# Altium PCB InvControlCardLayout.PcbDoc (part 2 of 2)
Units mil, origin at the board's own origin, x right, y up, seen from the top; angles counter-clockwise.
Board outline 9055.12 x 6692.91 mil, 4 copper layers (Top, GND PLANE, POWER PLANE, Bottom), stack 25.5 mil thick; 291 components, 194 nets, 954 pads, 275 vias.
Unrouted connection lines stored in the file: 3.
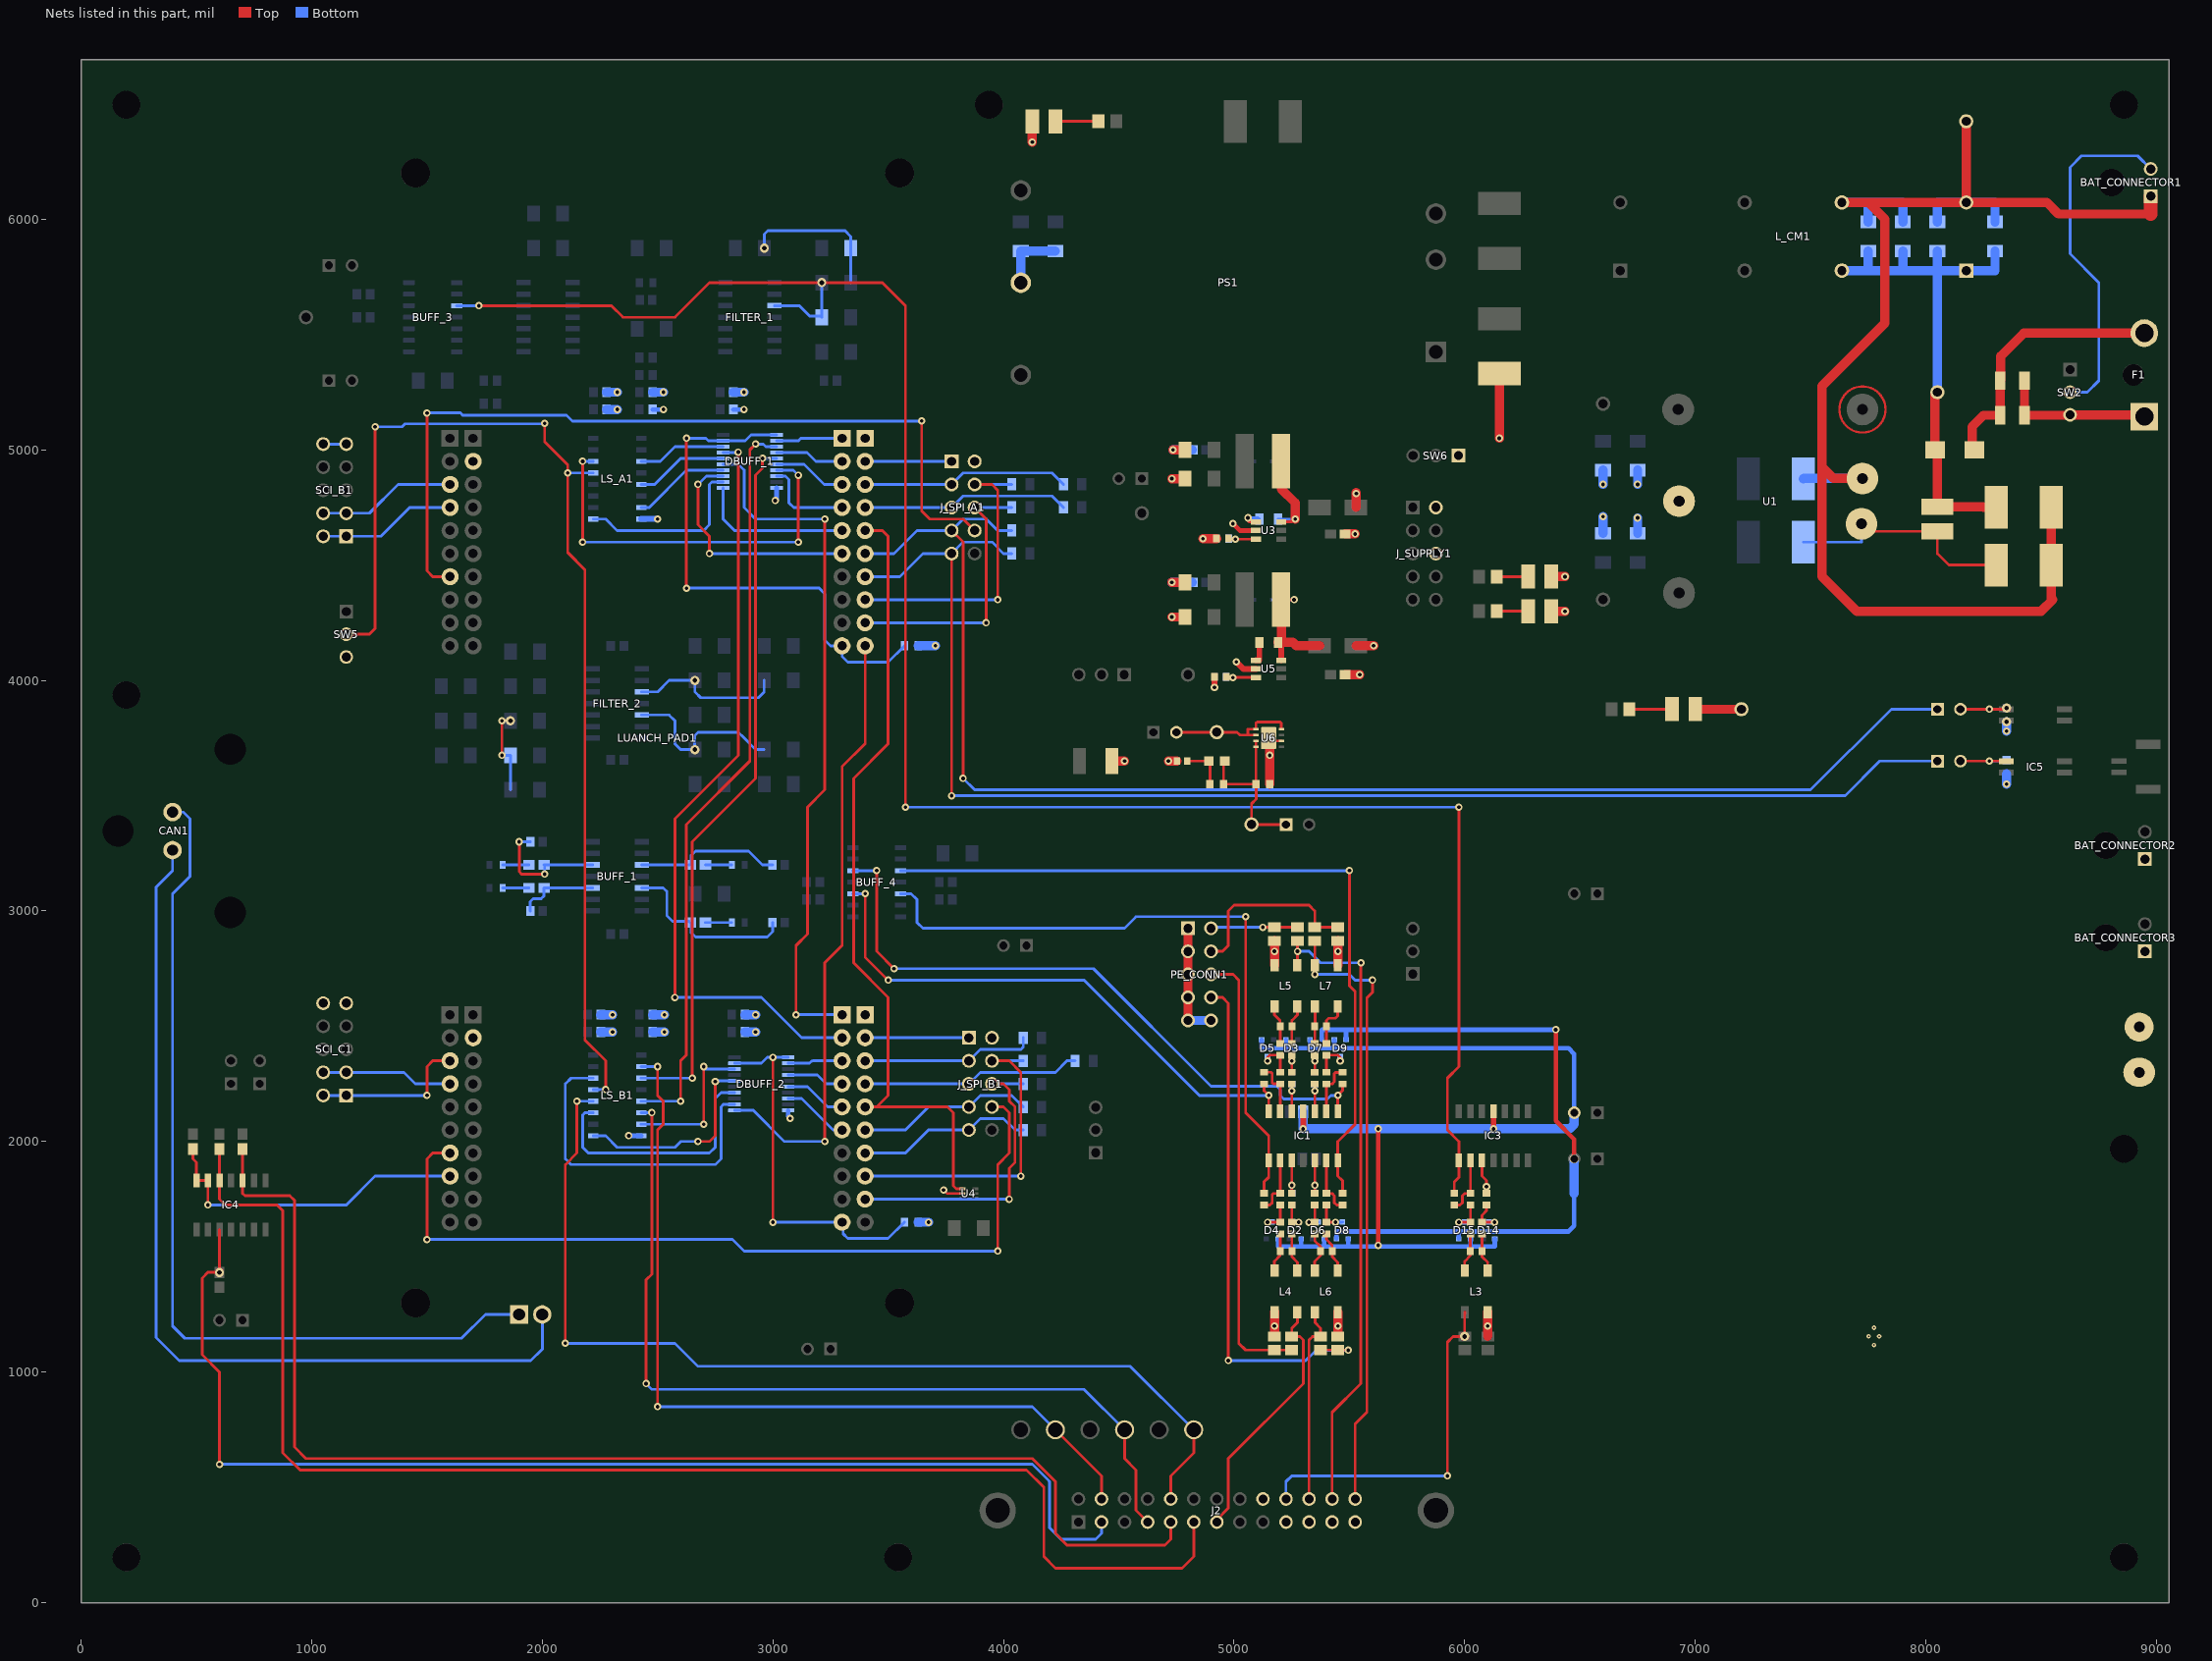
[diagram p4: the nets of this part, all layers, seen from the top]

## Via types
v1: diameter 32, hole 16, Top to Bottom, 259 vias
v2: diameter 40, hole 20, Top to Bottom, 12 vias
v3: diameter 19.68, hole 7.87, Top to Bottom, 4 vias

## Nets (pads, with @x,y where several pads share a name; then routed paths per layer and width w, separated by ;. In a path a pad name is that pad's centre, name@x,y a point inside that pad or via, vN(x,y) a via of type N, cw(c..) or ccw(c..) an arc to the next point about the centre after c; other vN are vias at no path point) (continued)
ERR_HB1_OUT: J2.3 | length 5246.8
  Top w12: v1(600,600) 600,1000 525,1075 525,1400 525,1407.51 550,1432.51 v2(600,1432.51) 600,1618.23
  Bottom w12: v1(600,600) 4125,600 4188.7,536.3 4200,525 4200,325 4250,275 4400,275 4425,300 J2.3@4425,350
ERR_HB2_OUT: IC4.13 IC4.14 LUANCH_PAD1.48 R64.1 | length 1400.5
  Top w12: R64.1@485,1967.49 485,1925 500,1910 IC4.14@500,1831.77 IC4.13@550,1831.77 v1(550,1725)
  Bottom w12: v1(550,1725) 1150,1725 1275,1850 LUANCH_PAD1.48@1600,1850
ERR_HB3_OUT: IC4.10 J2.9 R65.1 | length 5693.1
  Top w12: R65.1@700,1967.49 IC4.10@700,1831.77 700,1775 710,1765 905,1765 925,1745 925,675 975,625 4125,625 4225,525 4225,300 4275,250 4700,250 4725,275 J2.9@4725,350
GND_AUX: C1.2 C3.2 C11.2 C13.2 J2.21 J2.23 J2.25 L3.2 L4.1 L5.2 L6.2 L7.1 | length 636.7
  Top w40: C13.2@5175,2870.47 v1(5175,2825) 5175,2765.35 L5.2@5175.79,2764.57 ; L4.1@5175.79,1260.43 v1@5175.79,1200 ; L6.2@5449.21,1260.43 5450,1259.65 v1(5450,1200) C1.2@5450,1154.53 ; L7.1@5449.21,2764.57 L7.1@5450,2765.35 ; C11.2@5450,2870.47 v1(5450,2825) ; L3.2@6099.21,1260.43 6100,1234.65 v1(6100,1200) 6100,1154.53 ; v1@5175.79,1200 v1(5175,1200) C3.2@5175,1154.53 5175.79,1155.32 v1@5175.79,1200 ; L7.1@5450,2765.35 v1(5450,2825) ; L7.1@5450,2765.35 v1(5450,2825)
GPIO0/PWMOUT1A: DBUFF_1.2 LUANCH_PAD1.40 | length 288.2
  Bottom w12: DBUFF_1.2@3016.14,5039.57 3110.71,5039.57 3121.15,5050 LUANCH_PAD1.40@3300,5050
GPIO1/PWMOUT1B: DBUFF_1.4 LUANCH_PAD1.39 | length 299.8
  Bottom w12: DBUFF_1.4@3016.14,4988.39 3147.65,4988.39 3186.03,4950 LUANCH_PAD1.39@3300,4950
GPIO2/PWMOUT2A: DBUFF_1.6 LUANCH_PAD1.38 | length 320
  Bottom w12: DBUFF_1.6@3016.14,4937.2 3135.64,4937.2 3222.85,4850 LUANCH_PAD1.38@3300,4850
GPIO3/PWMOUT2B: DBUFF_1.8 LUANCH_PAD1.37 | length 399.4
  Bottom w12: DBUFF_1.8@3016.14,4886.02 3055,4886.02 3070,4871.02 3070,4770 3090,4750 LUANCH_PAD1.37@3300,4750
GPIO4/PWMOUT3A: DBUFF_1.11 LUANCH_PAD1.36 | length 671.7
  Bottom w12: DBUFF_1.11@2783.86,4834.84 2783.86,4700 2833.86,4650 LUANCH_PAD1.36@3300,4650
GPIO5/PWMOUT3B: DBUFF_1.13 LUANCH_PAD1.35 | length 1019.5
  Top w12: v1(2675,4850) 2675,4675 2725,4625 v1(2725,4550)
  Bottom w12: v1(2675,4850) 2711.02,4886.02 DBUFF_1.13@2783.86,4886.02 ; v1(2725,4550) LUANCH_PAD1.35@3300,4550
GPIO6/PWMOUT4A: DBUFF_1.15 LUANCH_PAD1.80 | length 3036.2
  Top w12: v1(3100,2550) 3100,2850 3150,2900 3150,3450 3225,3525 v1(3225,4700)
  Bottom w12: DBUFF_1.15@2783.86,4937.2 2850,4937.2 2875,4912.2 2875,4750 2925,4700 v1(3225,4700) ; v1(3100,2550) LUANCH_PAD1.80@3300,2550
GPIO7/PWMOUT4B: DBUFF_1.17 LUANCH_PAD1.79 | length 3343.2
  Top w12: v1(2575,2625) 2575,3399.76 2850,3674.76 v1(2850,4990)
  Bottom w12: v1(2575,2625) 2950,2625 3125,2450 LUANCH_PAD1.79@3300,2450 ; DBUFF_1.17@2783.86,4988.39 2848.39,4988.39 v1(2850,4990)
GPIO8/PWMOUT5A: DBUFF_2.2 LUANCH_PAD1.78 | length 238.2
  Bottom w12: DBUFF_2.2@3066.14,2339.57 3158.82,2339.57 3168.9,2349.65 3174.65,2349.65 3175,2350 LUANCH_PAD1.78@3300,2350
GPIO9/PWMOUT5B: DBUFF_2.4 LUANCH_PAD1.77 | length 249.8
  Bottom w12: DBUFF_2.4@3066.14,2288.39 3192.45,2288.39 3230.83,2250 LUANCH_PAD1.77@3300,2250
GPIO10/PWMOUT6A: DBUFF_2.6 LUANCH_PAD1.76 | length 270
  Bottom w12: DBUFF_2.6@3066.14,2237.2 3150,2237.2 3237.2,2150 LUANCH_PAD1.76@3300,2150
GPIO11/PWMOUT6B: DBUFF_2.8 LUANCH_PAD1.75 | length 290.2
  Bottom w12: DBUFF_2.8@3066.14,2186.02 3125,2186.02 3261.02,2050 LUANCH_PAD1.75@3300,2050
GPIO26/SD2D2: J_SPI_B1.4 LUANCH_PAD1.53 R_UP9.1 | length 1406.3
  Top w12: J_SPI_B1.4@3950,2350 4025,2350 4075,2300 v1(4075,1850)
  Bottom w12: LUANCH_PAD1.53@3400,1850 v1(4075,1850) ; J_SPI_B1.4@3950,2350 R_UP9.1@4085.63,2350
GPIO27/SD2CLK2: J_SPI_B1.6 LUANCH_PAD1.52 R_UP10.1 | length 1341.7
  Top w12: J_SPI_B1.6@3950,2250 4000,2250 4025,2225 4025,2175 4050,2150 4050,1910 4025,1885 v1(4025,1750)
  Bottom w12: LUANCH_PAD1.52@3400,1750 v1(4025,1750) ; J_SPI_B1.6@3950,2250 R_UP10.1@4085.63,2250
GPIO29/OPXBAR6: DBUFF_2.11 LUANCH_PAD1.11 | length 2669.6
  Top w12: v1(3225,2000) 3225,2775 3300,2850 3300,3625 3400,3725 LUANCH_PAD1.11@3400,4150
  Bottom w12: DBUFF_2.11@2833.86,2134.84 2834.02,2135 2915,2135 3050,2000 v1(3225,2000)
GPIO56/SCIC_TX: LUANCH_PAD1.44 SCI_C1.3 SCI_C1.4 | length 570.7
  Bottom w12: SCI_C1.4@1050,2300 SCI_C1.3@1150,2300 1400,2300 1450,2250 LUANCH_PAD1.44@1600,2250
GPIO58/SPIAMOSI: J_SPI_A1.7 LUANCH_PAD1.15 P1.1 R_UP2.1 | length 6204.9
  Top w12: J_SPI_A1.7@3775,4650 3825,4600 v1(3825,3575)
  Bottom w12: LUANCH_PAD1.15@3400,4550 3525,4550 3625,4650 J_SPI_A1.7@3775,4650 3825,4700 3925,4700 3975,4650 R_UP2.1@4035.63,4650 ; v1(3825,3575) 3875,3525 7500,3525 7850,3875 P1.1@8050,3875
GPIO59/SPIAMISO: J_SPI_A1.9 LUANCH_PAD1.14 P15.1 R_UP6.1 | length 6105.6
  Top w12: v1(3775,3500) J_SPI_A1.9@3775,4550
  Bottom w12: LUANCH_PAD1.14@3400,4450 3550,4450 3650,4550 J_SPI_A1.9@3775,4550 3825,4600 3950,4600 4000,4550 R_UP6.1@4035.63,4550 ; v1(3775,3500) 7650,3500 7800,3650 P15.1@8050,3650
GPIO60/SPIACLK: J_SPI_A1.8 LUANCH_PAD1.7 | length 3610.1
  Top w12: v1(1500,5160) 1500,4475 1525,4450 LUANCH_PAD1.7@1600,4450 ; v1(3645,5125) 3645,4735 3680,4700 3785,4700 3825,4700 J_SPI_A1.8@3875,4650
  Bottom w12: v1(1500,5160) 1644.76,5160 1654.76,5150 2105,5150 2130,5125 v1(3645,5125)
GPIO61/SPIACS: J_SPI_A1.1 LUANCH_PAD1.19 | length 375
  Bottom w12: LUANCH_PAD1.19@3400,4950 J_SPI_A1.1@3775,4950
GPIO63/SPIBMOSI: J_SPI_B1.7 LUANCH_PAD1.55 R_UP5.1 | length 768.5
  Bottom w12: LUANCH_PAD1.55@3400,2050 3575,2050 3675,2150 J_SPI_B1.7@3850,2150 3900,2200 4035.63,2200 R_UP5.1@4085.63,2150
GPIO64/SPIBMISO: J_SPI_B1.9 LUANCH_PAD1.54 R_UP1.1 | length 768.5
  Bottom w12: LUANCH_PAD1.54@3400,1950 3575,1950 3675,2050 J_SPI_B1.9@3850,2050 3900,2100 4000,2100 4050,2050 R_UP1.1@4085.63,2050
GPIO65/SPIBCLK: J_SPI_B1.8 LUANCH_PAD1.47 | length 3662.1
  Top w12: v1(1500,1575) 1500,1925 1525,1950 LUANCH_PAD1.47@1600,1950 ; J_SPI_B1.8@3950,2150 4000,2150 4025,2125 4025,1950 3975,1900 v1(3975,1525)
  Bottom w12: v1(1500,1575) 2825,1575 2875,1525 v1(3975,1525)
GPIO66/SPIBCS: J_SPI_B1.1 LUANCH_PAD1.59 | length 450
  Bottom w12: LUANCH_PAD1.59@3400,2450 J_SPI_B1.1@3850,2450
GPIO122/SD1D1: J_SPI_A1.5 LUANCH_PAD1.17 R_UP7.1 | length 902.1
  Bottom w12: LUANCH_PAD1.17@3400,4750 J_SPI_A1.5@3775,4750 3825,4800 4210.63,4800 R_UP7.1@4260.63,4750
GPIO123/SD1CLK1: J_SPI_A1.3 LUANCH_PAD1.18 R_UP3.1 | length 902.1
  Bottom w12: LUANCH_PAD1.18@3400,4850 J_SPI_A1.3@3775,4850 3825,4900 4210.63,4900 R_UP3.1@4260.63,4850
GPIO124/SD1D2: J_SPI_A1.4 LUANCH_PAD1.13 R_UP12.1 | length 1321
  Top w12: J_SPI_A1.4@3875,4850 3950,4850 3975,4825 v1(3975,4350)
  Bottom w12: LUANCH_PAD1.13@3400,4350 v1(3975,4350) ; J_SPI_A1.4@3875,4850 R_UP12.1@4035.63,4850
GPIO125/SD1CLK2: J_SPI_A1.6 LUANCH_PAD1.12 R_UP11.1 | length 1206.3
  Top w12: J_SPI_A1.6@3875,4750 3925,4700 v1(3925,4250)
  Bottom w12: LUANCH_PAD1.12@3400,4250 v1(3925,4250) ; J_SPI_A1.6@3875,4750 R_UP11.1@4035.63,4750
GPIO130/SD2D1: J_SPI_B1.5 LUANCH_PAD1.57 R_UP4.1 | length 952.1
  Bottom w12: LUANCH_PAD1.57@3400,2250 J_SPI_B1.5@3850,2250 3900,2300 4225,2300 4275,2350 R_UP4.1@4310.63,2350
GPIO131/SD2CLK1: J_SPI_B1.3 LUANCH_PAD1.58 R_UP8.1 | length 750.5
  Bottom w12: LUANCH_PAD1.58@3400,2350 J_SPI_B1.3@3850,2350 3900,2400 4075.63,2400 4085.63,2410 R_UP8.1@4085.63,2450
GPIO139/SCIC_RX: LUANCH_PAD1.43 SCI_C1.1 SCI_C1.2 | length 685.4
  Top w12: v1(1500,2200) 1500,2325 1525,2350 LUANCH_PAD1.43@1600,2350
  Bottom w12: SCI_C1.2@1050,2200 SCI_C1.1@1150,2200 v1(1500,2200)
I_ANA_OUT_HB1: C2.1 J2.22 L6.1 | length 861.7
  Top w12: J2.22@5325,450 5325,1139.53 5340,1154.53 C2.1@5375,1154.53 5375,1190.79 5350.79,1215 L6.1@5350.79,1260.43
I_ANA_OUT_HB2: C12.1 J2.24 L5.1 | length 2779.2
  Top w12: L5.1@5274.21,2764.57 5275,2764.57 v1(5275,2825) C12.1@5275,2870.47 ; J2.24@5425,450 5425,825 5550,950 v1(5550,2775)
  Bottom w12: v1(5275,2825) 5325,2825 5375,2775 v1(5550,2775)
I_ANA_OUT_HB3: C10.1 J2.26 L7.2 | length 2698.4
  Top w12: v1(5350,2725) L7.2@5350,2775 ; C10.1@5350,2870.47 L7.2@5350,2775 ; L7.2@5350.79,2764.57 5350,2765.35 L7.2@5350,2775 ; J2.26@5525,450 5525,775 5575,825 5576.25,825 5576.25,2623.75 5600,2647.5 v1(5600,2700)
  Bottom w12: v1(5350,2725) 5500,2725 5525,2700 v1(5600,2700)
I_DIFF_OUT_HB1: BUFF_4.3 IC1.7 R45.2 | length 3395.8
  Top w12: R45.2@5470,1775.59 5470,1830 5450,1850 IC1.7@5450,1918.23 5450,2000 5525,2075 5525,2650 5500,2675 v1(5500,3175)
  Bottom w12: BUFF_4.3@3553.35,3175 v1(5500,3175)
I_DIFF_OUT_HB2: BUFF_4.12 IC1.8 R48.2 | length 2865.2
  Top w12: v1(3450,3175) 3450,2825 v1(3525,2750) ; IC1.8@5450,2131.77 v1(5450,2200) 5450,2201.74 5470,2221.74 R48.2@5470,2249.41
  Bottom w12: BUFF_4.12@3346.65,3175 v1(3450,3175) ; v1(3525,2750) 4390,2750 4900,2240 5185,2240 5200,2225 5200,2200 5215,2185 5405,2185 5420,2200 v1(5450,2200)
I_DIFF_OUT_HB3: BUFF_4.10 IC1.14 R34.2 | length 2452.8
  Top w12: v1(3400,3075) 3400,2800 v1(3500,2700) ; R34.2@5130,2249.41 5130,2220 v1(5150,2200) IC1.14@5150,2131.77
  Bottom w12: BUFF_4.10@3346.65,3075 v1(3400,3075) ; v1(3500,2700) 4350,2700 4850,2200 v1(5150,2200)
MODE: LS_A1.13 LS_B1.13 SW5.2 | length 4916.3
  Top w12: SW5.2@1150,4200 1250,4200 1275,4225 v1(1275,5100) ; v1(2010,5115) 2010,5035 2110,4935 v1(2110,4900) 2110,4555 2185,4480 2185,2440 2275,2350 v1(2275,2225)
  Bottom w12: v1(1275,5100) 1391.18,5100 1403.96,5112.78 2007.78,5112.78 v1(2010,5115) ; v1(2110,4900) LS_A1.13@2221.06,4900 ; LS_B1.13@2221.06,2225 v1(2275,2225)
NET5_1: 5.1 U5.1 | length 92.4
  Top w25: U5.1@5094.88,4087.4 5109.65,4087.4 5.1@5109.65,4165
NET5_2: 5.2 L2.2 U5.6 | length 599.6
  Top w12: L2.2@5203.74,4350 v1(5260,4350)
  Top w25: 5.2@5205,4165 5205.12,4164.88 U5.6@5205.12,4087.4
  Top w40: 5.2@5190.35,4165 5.2@5205,4165 ; L2.2@5203.74,4350 5205,4343.74 5.2@5205,4165 ; 5371.26,4150 5270,4150 5255,4165 5.2@5205,4165
  Bottom w12: 5166.54,4350 v1(5260,4350)
NET6_2: 6.2 8.2 U5.3 | length 161.7
  Top w12: 6.2@4965.59,4015 4967.99,4012.6 v1(4995,4012.6) U5.3@5094.88,4012.6
  Bottom w12: 8.2@4964.61,4015 4967.01,4012.6 v1(4995,4012.6)
NET10_1: 10.1 U3.1 | length 101.3
  Top w12: v1(5060,4705) 5060,4692.4 5065,4687.4 U3.1@5094.88,4687.4
  Bottom w12: v1(5060,4705) 5104.65,4705 10.1@5109.65,4700
NET10_2: 10.2 L8.2 U3.6 | length 418.5
  Top w12: U3.6@5205.12,4687.4 5250,4687.4 5265,4702.4 v1(5265,4700)
  Top w40: L8.2@5203.74,4950 5205,4948.74 5205,4830 5265,4770 5265,4730 v1(5265,4700)
  Bottom w12: 10.2@5190.35,4700 v1(5265,4700)
NET11_2: 11.2 13.2 U3.3 | length 148.9
  Top w12: 11.2@4975.59,4615 4988.19,4612.6 v1(5005,4612.6) U3.3@5094.88,4612.6
  Bottom w12: 13.2@4976.57,4615 4978.98,4612.6 v1(5005,4612.6)
NETBAT_CONNECTOR1_2: BAT_CONNECTOR1.2 SW2.2 | length 1516.8
  Bottom w12: SW2.2@8625,5250 8700,5250 8750,5300 8750,5725 8625,5850 8625,6225 8675,6275 8918.11,6275 BAT_CONNECTOR1.2@8975,6218.11
NETBUFF_1_3: BUFF_1.3 R1.2 R4.2 | length 638.8
  Bottom w12: BUFF_1.3@2431.3,3200 R4.2@2642.49,3200 2645,3202.51 2645,3240 2665,3260 2895,3260 2955,3200 R1.2@2998.43,3200
NETBUFF_1_5: BUFF_1.5 R6.2 R9.2 | length 790.7
  Bottom w12: BUFF_1.5@2431.3,3100 2525,3100 2540,3085 2540,2980 2565,2955 2637.49,2955 R9.2@2642.49,2950 2645,2947.49 2645,2906.57 2665,2886.57 2975,2886.57 2998.43,2910 R6.2@2998.43,2950
NETBUFF_1_10: BUFF_1.10 R11.2 R14.2 | length 356.9
  Bottom w12: R11.2@1948.43,3000 1947.51,3000.92 1947.51,3040 1960,3052.49 1995,3052.49 2007.51,3065 R14.2@2007.51,3100 BUFF_1.10@2218.7,3100
NETBUFF_1_12: BUFF_1.12 R16.2 R19.2 | length 544.8
  Top w12: v1(1900,3300) 1900,3170 1910,3160 v1(2010,3160)
  Bottom w12: v1(1900,3300) R16.2@1948.43,3300 ; v1(2010,3160) 2010,3197.51 R19.2@2007.51,3200 BUFF_1.12@2218.7,3200
NETBUFF_2_3: 
NETC9_1: C9.1 C59.1 L1.2 U1.1 | length 1046.6
  Top w12: U1.1@7721.06,4678.94 7753.15,4646.85 L1.2@8050,4646.85 8050,4550 8100,4500 C9.1@8305.91,4500
  Bottom w12: C59.1@7469.09,4600 7721.06,4600 U1.1@7721.06,4678.94
NETC40_1: 
NETC41_1: 
NETC42_1: C42.1 | length 374
  Top w12: v1(1825,3675) v1(1825,3825)
  Bottom w12: v1(1825,3675) C42.1@1862.01,3675 1862.01,3525 ; v1(1825,3825) v2(1862.01,3825)
NETC43_1: 
NETC44_1: C44.1 | length 651.5
  Bottom w12: v2(2962.99,5875) 2962.99,5935 2977.99,5950 3312.9,5950 3337.99,5924.9 C44.1@3337.99,5875 3337.99,5725
NETC45_1: 
NETC46_1: 
NETC49_1: C49.1 FILTER_1.3 | length 376.4
  Bottom w12: FILTER_1.3@3006.3,5625 3115,5625 3160,5580 3207.01,5580 C49.1@3212.01,5575 v2(3212.01,5725)
NETC50_1: FILTER_2.5 | length 751.5
  Bottom w12: FILTER_2.5@2431.3,3850 2550,3850 2575,3825 2575,3725 2600,3700 v2(2662.01,3700) 2660,3702.01 2660,3760 2675,3775 2850,3775 2875,3750 2925,3700 2962.01,3700
NETC51_1: FILTER_2.3 | length 672.1
  Bottom w12: FILTER_2.3@2431.3,3950 2500,3950 2550,4000 v2(2662.01,4000) 2662.01,3950 2687.01,3925 2700,3925 2937.01,3925 2962.01,3950 2962.01,4000
NETC71_1: C71.1 C72.1 P17.1 R68.2 TP_5.1 U6.3 U6.4 | length 763.9
  Top w12: R68.2@4959.52,3650 4954.53,3645.01 C72.1@4954.53,3550 C71.1@5095.47,3550 ; U6.3@5094.88,3737.2 U6.4@5094.88,3711.61 5094.88,3550.59 C71.1@5095.47,3550 ; P17.1@5225,3375 TP_5.1@5075,3375 5075.47,3375.47 5075.47,3465 5095.47,3485 C71.1@5095.47,3550
NETC72_2: C72.2 R68.1 R69.2 | length 194.9
  Top w12: R69.2@4797.64,3650 R68.1@4890.48,3650 4895.47,3645.01 C72.2@4895.47,3550
NETC_1_1: 
NETCAN1_1: CAN1.1 J3.2 | length 4030.7
  Bottom w12: CAN1.1@396.81,3263.78 396.81,3175 325,3103.19 325,1150 425,1050 1950,1050 2000,1100 J3.2@2000,1250
NETCAN1_2: CAN1.2 J3.1 | length 3886
  Bottom w12: CAN1.2@396.81,3429.13 442.7,3429.13 471.83,3400 471.83,3150 396.83,3074.99 396.83,2775 396.89,1200 450,1146.89 1650,1146.89 1753.11,1250 J3.1@1900,1250
NETD2_3: D2.3 R21.2 R22.1 | length 119.7
  Top w12: R22.1@5250,1724.41 R21.2@5250,1650.59 5250.59,1650 v1(5280,1650)
  Bottom w12: D2.3@5265,1651.42 5278.58,1651.42 v1(5280,1650)
NETD3_3: D3.3 R23.2 R24.1 | length 92.4
  Top w12: R24.1@5250,2300.59 v1(5250,2350) R23.2@5250,2374.41
  Bottom w12: v1(5250,2350) D3.3@5250,2368.58
NETD4_3: D4.3 R29.2 R30.1 | length 149.7
  Top w12: v1(5145,1650) 5199.41,1650 R29.2@5200,1650.59 R30.1@5200,1724.41
  Bottom w12: v1(5145,1650) 5163.58,1650 D4.3@5165,1651.42
NETD5_3: D5.3 R32.2 R33.1 | length 166.8
  Top w12: v1(5145,2350) 5145,2365 5155,2375 5199.41,2375 R32.2@5200,2374.41 R33.1@5200,2300.59
  Bottom w12: v1(5145,2350) D5.3@5145,2368.58
NETD6_3: D6.3 R35.2 R36.1 | length 139.7
  Top w12: v1(5325,1650) 5349.41,1650 R35.2@5350,1650.59 R36.1@5350,1724.41
  Bottom w12: v1(5325,1650) 5363.58,1650 D6.3@5365,1651.42
NETD7_3: D7.3 R37.2 R38.1 | length 94.5
  Top w12: R38.1@5350,2300.59 v1(5350,2350) R37.2@5350,2374.41
  Bottom w12: v1(5350,2350) 5355,2355 D7.3@5355,2368.58
NETD8_3: D8.3 R43.2 R44.1 | length 144.7
  Top w12: R44.1@5400,1724.41 R43.2@5400,1650.59 5439.41,1650.59 v1(5440,1650)
  Bottom w12: v1(5440,1650) 5468.58,1650 D8.3@5470,1651.42
NETD9_3: D9.3 R46.2 R47.1 | length 171.8
  Top w12: R47.1@5400,2300.59 R46.2@5400,2374.41 5400.59,2375 5450,2375 5460,2365 v1(5460,2350)
  Bottom w12: v1(5460,2350) D9.3@5460,2368.58
NETD14_3: D14.3 R58.2 R59.1 | length 162.9
  Top w12: R59.1@6095,1724.41 6095,1700 6075,1680 R58.2@6075,1650.59 6075.59,1650 v1(6130,1650)
  Bottom w12: D14.3@6105,1651.42 6128.58,1651.42 v1(6130,1650)
NETD15_3: D15.3 R61.2 R62.1 | length 149.7
  Top w12: v1(5975,1650) 5975.59,1650.59 R61.2@6025,1650.59 R62.1@6025,1724.41
  Bottom w12: v1(5975,1650) 5998.58,1650 D15.3@6000,1651.42
NETIC1_2: IC1.2 R30.2 R31.1 | length 254.7
  Top w12: R31.1@5130,1724.41 5155,1724.41 5165,1734.41 5165,1770 5170,1775 5199.41,1775 R30.2@5200,1775.59 IC1.2@5200,1918.23
NETIC1_3: IC1.3 R22.2 R25.2 | length 177
  Top w12: R22.2@5250,1775.59 v1(5250,1810) IC1.3@5250,1918.23
  Bottom w12: R25.2@5250,1775.59 v1(5250,1810)
NETIC1_5: IC1.5 R36.2 R39.2 | length 177
  Top w12: R36.2@5350,1775.59 v1(5350,1810) IC1.5@5350,1918.23
  Bottom w12: R39.2@5350,1775.59 v1(5350,1810)
NETIC1_6: IC1.6 R44.2 R45.1 | length 251.8
  Top w12: IC1.6@5400,1918.23 R44.2@5400,1775.59 5400.59,1775 5425,1775 5435,1765 5435,1734.41 5445,1724.41 R45.1@5470,1724.41
NETIC1_9: IC1.9 R47.2 R48.1 | length 229.7
  Top w12: IC1.9@5400,2131.77 R47.2@5400,2249.41 5425,2249.41 5435,2259.41 5435,2295 5440,2300 5469.41,2300 R48.1@5470,2300.59
NETIC1_10: IC1.10 R38.2 R42.2 | length 177.1
  Top w12: IC1.10@5350,2131.77 R38.2@5350,2249.41 5349.41,2220 v1(5350,2220)
  Bottom w12: v1(5350,2220) R42.2@5350,2249.41
NETIC1_12: IC1.12 R24.2 R28.2 | length 177.1
  Top w12: IC1.12@5250,2131.77 R24.2@5250,2249.41 5250.59,2220 v1(5250,2220)
  Bottom w12: v1(5250,2220) R28.2@5250,2249.41
NETIC1_13: IC1.13 R33.2 R34.1 | length 232.6
  Top w12: R34.1@5130,2300.59 5160,2300.59 5165,2295.59 5165,2255 5170,2250 5199.41,2250 R33.2@5200,2249.41 IC1.13@5200,2131.77
NETIC2_3: P1.2 | length 275.9
  Top w12: P1.2@8150,3875 v1(8275,3875) v2@8349.02,3875
  Bottom w12: v1(8275,3875) 8345.47,3875 v2(8350,3879.53)
NETIC3_2: IC3.2 R62.2 R63.1 | length 251.8
  Top w12: R63.1@5955,1724.41 5980,1724.41 5990,1734.41 5990,1765 6000,1775 6024.41,1775 R62.2@6025,1775.59 IC3.2@6025,1918.23
NETIC3_3: IC3.3 R55.1 R59.2 | length 180.4
  Top w12: IC3.3@6075,1918.23 6075,1850 6094.39,1830.61 v1(6094.39,1805) 6094.39,1779.92 R59.2@6095,1775.59
  Bottom w12: v1(6094.39,1805) 6094.39,1776.2 R55.1@6095,1775.59
NETIC5_3: IC5.3 P15.2 R67.2 | length 275.9
  Top w12: P15.2@8150,3650 v1(8275,3650) IC5.3@8349.02,3650
  Bottom w12: v1(8275,3650) 8345.47,3650 R67.2@8350,3654.53
NETL3_2: L3.3 R58.1 R60.2 | length 170.5
  Top w12: R58.1@6075,1599.41 6075.59,1598.82 R60.2@6075.59,1525 6075.59,1500 6100,1475.59 6100,1440.35 L3.3@6099.21,1439.57
NETL3_3: L3.4 R60.1 R61.1 | length 170.5
  Top w12: L3.4@6000.79,1439.57 6000,1440.35 6000,1480.59 6024.41,1505 R60.1@6024.41,1525 6024.41,1598.82 R61.1@6025,1599.41
NETL5_3: L5.3 R27.1 R32.1 | length 170.5
  Top w12: L5.3@5175.79,2585.43 5175,2584.65 5175,2549.41 5199.41,2525 R27.1@5199.41,2500 5200,2499.41 R32.1@5200,2425.59
NETL5_4: L5.4 R23.1 R27.2 | length 170.5
  Top w12: R23.1@5250,2425.59 5250,2499.41 R27.2@5250.59,2500 5250.59,2525 5275,2549.41 5275,2584.65 L5.4@5274.21,2585.43
NETL6_3: L6.3 R40.1 R43.1 | length 180.9
  Top w12: R43.1@5400,1599.41 5400,1575 5425,1550 5425,1525.59 R40.1@5425.59,1525 5425.59,1500 5450,1475.59 5450,1440.35 L6.3@5449.21,1439.57
NETL6_4: L6.4 R35.1 R40.2 | length 180.9
  Top w12: R35.1@5350,1599.41 5350,1569.41 5374.41,1545 R40.2@5374.41,1525 5374.41,1505 5349.41,1480 5349.41,1440.94 L6.4@5350.79,1439.57
NETL7_3: L7.4 R41.1 R46.1 | length 198.1
  Top w12: R46.1@5400,2425.59 5400,2499.41 R41.1@5400.59,2500 5400.59,2525 5410.59,2535 5440,2535 5450,2545 5450,2584.65 L7.4@5449.21,2585.43
NETL7_4: L7.3 R37.1 R41.2 | length 160.7
  Top w12: R37.1@5350,2425.59 5350,2499.41 R41.2@5349.41,2500 5350.79,2501.38 L7.3@5350.79,2585.43
NETLED1_1: LED1.1 RDS1.1 | length 136.4
  Top w12: RDS1.1@6138.43,4300 LED1.1@6274.8,4300
NETLED2_1: LED2.1 RDS2.1 | length 136.4
  Top w12: RDS2.1@6138.43,4450 LED2.1@6274.8,4450
NETLED3_1: LED3.1 RDS3.1 | length 186.4
  Top w12: RDS3.1@6713.43,3875 LED3.1@6899.8,3875
NETLED4_1: LED4.1 RDS4.1 | length 186.4
  Top w12: LED4.1@4225.2,6425 RDS4.1@4411.57,6425
NETP16_2: P16.2 TP_4.1 U6.1 U6.2 U6.8 | length 578.1
  Top w12: P16.2@4750,3775 TP_4.1@4925,3775 5012.8,3775 5025,3762.8 5060,3762.8 ; U6.2@5094.88,3762.8 5060,3762.8 ; U6.8@5205.12,3788.39 5205.12,3815 5200,3820.12 5100,3820.12 5095,3815.12 5095,3788.5 U6.1@5094.88,3788.39 5060,3788.39 5060,3762.8
NETPE_CONN1_1: PE_CONN1.1 PE_CONN1.3 PE_CONN1.5 PE_CONN1.7 PE_CONN1.9 PE_CONN1.10 | length 500
  Top w40: PE_CONN1.9@4800,2525 PE_CONN1.7@4800,2625 PE_CONN1.5@4800,2725 PE_CONN1.3@4800,2825 PE_CONN1.1@4800,2925
  Bottom w40: PE_CONN1.9@4800,2525 PE_CONN1.10@4900,2525
NETR4_1: R4.1 R5.2 | length 114
  Bottom w12: R4.1@2707.51,3200 R5.2@2821.46,3200
NETR9_1: R9.1 R10.2 | length 114
  Bottom w12: R9.1@2707.51,2950 R10.2@2821.46,2950
NETR14_1: R14.1 R15.2 | length 114
  Bottom w12: R15.2@1828.54,3100 R14.1@1942.49,3100
NETR19_1: R19.1 R20.2 | length 114
  Bottom w12: R20.2@1828.54,3200 R19.1@1942.49,3200
NETR25_1: 
NETR26_2: 
NETR_4_1: 
NON_ISOGND: BAT_CONNECTOR1.1 C7.2 C8.2 C9.2 C56.1 C66.2 C67.2 C68.2 C_EMI_2.2 L_CM1.4 TP_NONISOGND1.1 U1.2 | length 6998.6
  Top w10: 7825,5175 ccw(c7725,5175) 7825,5175
  Top w40: L_CM1.4@7635.63,6072.64 7725,6072.64 ; U1.2@7725,4875.79 7599.21,4875.79 7550,4925 ; TP_NONISOGND1.1@8175,6425 C_EMI_2.2@8175,6072.64 ; C68.2@8544.09,4750 C9.2@8544.09,4500 8544.09,4355.91 8550,4350 8500,4300 7700,4300 7550,4450 7550,4925 ; 8975,6022.64 8575,6022.64 8525,6072.64 C_EMI_2.2@8175,6072.64 ; 7550,4925 7550,5277.36 7822.64,5550 7822.64,6000 7750,6072.64 7725,6072.64 ; 7725,6072.64 C_EMI_2.2@8175,6072.64
  Top w60: 8975,6022.64 BAT_CONNECTOR1.1@8975,6100
  Bottom w40: C56.1@7469.09,4875 7469.88,4875.79 U1.2@7725,4875.79 ; L_CM1.4@7635.63,6072.64 7750,6072.64 ; C66.2@7750,5987.99 7750,6072.64 ; C67.2@7900,5987.99 7900,6072.64 7750,6072.64 ; C8.2@8050,5987.99 8050,6072.64 C_EMI_2.2@8175,6072.64 8300,6072.64 C7.2@8300,5987.99
OUT1: DBUFF_1.18 LS_A1.3 | length 381.4
  Bottom w12: LS_A1.3@2428.94,4950 2511.02,4950 2575,5013.98 DBUFF_1.18@2783.86,5013.98
OUT2: DBUFF_1.16 LS_A1.5 | length 401.6
  Bottom w12: LS_A1.5@2428.94,4850 2487.2,4850 2600,4962.8 DBUFF_1.16@2783.86,4962.8
OUT3: DBUFF_1.14 LS_A1.7 | length 421.9
  Bottom w12: LS_A1.7@2428.94,4750 2463.39,4750 2625,4911.61 DBUFF_1.14@2783.86,4911.61
OUT4: DBUFF_1.12 LS_A1.9 | length 773.4
  Bottom w12: LS_A1.9@2221.06,4700 2275,4700 2325,4650 2700,4650 2725,4675 2725,4850.43 2735,4860.43 DBUFF_1.12@2783.86,4860.43
OUT6: DBUFF_1.7 LS_A1.14 | length 1723.9
  Top w12: v1(2175,4600) v1(2175,4950) ; v1(3110,4600) v1(3110,4890)
  Bottom w12: v1(2175,4600) v1(3110,4600) ; v1(2175,4950) LS_A1.14@2221.06,4950 ; DBUFF_1.7@3016.14,4911.61 3088.39,4911.61 v1(3110,4890)
OUT7: DBUFF_1.5 LS_B1.3 | length 3096.3
  Top w12: v1(2650,2275) 2650,3300 2925,3575 2925,4890 2955,4920 v1(2955,4962.8)
  Bottom w12: LS_B1.3@2428.94,2275 v1(2650,2275) ; v1(2955,4962.8) DBUFF_1.5@3016.14,4962.8
OUT8: DBUFF_1.3 LS_B1.5 | length 3251.4
  Top w12: v1(2600,2175) 2600,2350 2625,2375 2625,3375 2900,3650 2900,5000 v1(2925,5025)
  Bottom w12: LS_B1.5@2428.94,2175 v1(2600,2175) ; v1(2925,5025) 2958.98,5025 2970,5013.98 DBUFF_1.3@3016.14,5013.98
OUT9: DBUFF_2.18 LS_B1.7 | length 665.9
  Top w12: v1(2700,2075) v1(2700,2325)
  Bottom w12: LS_B1.7@2428.94,2075 v1(2700,2075) ; v1(2700,2325) 2700,2313.98 DBUFF_2.18@2833.86,2313.98
OUT10: DBUFF_2.16 LS_B1.9 | length 890.4
  Top w12: v1(2675,2000) 2725,2000 2750,2025 v1(2750,2260)
  Bottom w12: LS_B1.9@2221.06,2025 2275,2025 2325,1975 2575,1975 2600,2000 v1(2675,2000) ; v1(2750,2260) 2755,2260 2757.8,2262.8 DBUFF_2.16@2833.86,2262.8
OUT11: DBUFF_2.14 LS_B1.11 | length 1091.7
  Bottom w12: LS_B1.11@2221.06,2125 2185,2125 2175,2115 2175,1975 2200,1950 2725,1950 2750,1975 2750,2186.61 2775,2211.61 DBUFF_2.14@2833.86,2211.61
OUT12: DBUFF_2.12 LS_B1.14 | length 1440.6
  Bottom w12: LS_B1.14@2221.06,2275 2125,2275 2100,2250 2100,1925 2125,1900 2750,1900 2775,1925 2775,2150.43 2785,2160.43 DBUFF_2.12@2833.86,2160.43
OVER_TEMP_OUT: IC4.12 J2.11 R66.1 | length 6066.8
  Top w12: R66.1@600,1967.49 IC4.12@600,1831.77 600,1750 625,1725 850,1725 875,1700 875,650 950,575 4100,575 4175,500 4175,200 4225,150 4775,150 4825,200 J2.11@4825,350
PE1: C3.1 C4.2 PE_CONN1.6 | length 1947.6
  Top w12: PE_CONN1.6@4900,2725 4995.47,2725 5020.47,2700 5020.47,1125 5050,1095.47 C3.1@5175,1095.47 C4.2@5250,1095.47
PE2: C1.1 C2.2 PE_CONN1.8 | length 2294.2
  Top w12: PE_CONN1.8@4900,2625 4950,2625 4975,2600 v1(4975,1050) ; C2.2@5375,1095.47 C1.1@5450,1095.47 5494.53,1095.47 v1(5495,1095)
  Bottom w12: v1(4975,1050) 5310,1050 5355,1095 v1(5495,1095)
PE3: C12.2 C13.1 PE_CONN1.2 | length 376.9
  Top w12: v1(5125,2929.53) C13.1@5175,2929.53 C12.2@5275,2929.53
  Bottom w12: PE_CONN1.2@4900,2925 4904.53,2929.53 v1(5125,2929.53)
PE4: C10.2 C11.1 PE_CONN1.4 | length 801.5
  Top w12: PE_CONN1.4@4900,2825 4950,2825 4975,2850 4975,3000 5000,3025 5325,3025 5350,3000 C10.2@5350,2929.53 C11.1@5450,2929.53
PGND: 1.1 1.2 4.1 6.1 7.1 9.1 11.1 12.1 BAT_CONNECTOR2.1 BAT_CONNECTOR3.1 C20.2 C25.2 C26.2 C27.2 C28.1 C29.1 C30.1 C31.1 C32.1 C33.1 C34.1 C35.1 C36.1 C37.1 C38.1 C39.1 C52.2 C53.2 C54.2 C55.2 C71.2 COUT_1.2 COUT_2.2 CY2.2 DBUFF_1.10 DBUFF_2.10 FB1.2 J2.18 J2.19 J_SPI_A1.2 J_SPI_B1.2 J_SUPPLY1.2 J_SUPPLY1.6 LED1.2 LED2.2 LED3.2 LED4.2 LS_A1.8 LS_B1.8 LUANCH_PAD1.20 LUANCH_PAD1.22 LUANCH_PAD1.60 LUANCH_PAD1.62 PS1.5 R69.1 RPULL_DOWN1.1 RPULL_DOWN2.1 SCI_B1.9 SCI_B1.10 SCI_C1.9 SCI_C1.10 SW5.3 SW6.1 TP_PGND1.1 U1.5 U3.2 U4.5 U5.2 U6.6 U6.9 | length 3785.5
  Top w10: v1(3740,1790) 3755,1775 U4.5@3822.44,1775 ; U6.9@5154.53,3737.2 U6.6@5205.12,3737.2
  Top w20: v1(4995,4680) 5025,4650 U3.2@5094.88,4650
  Top w25: 6.1@4914.41,4015 4914.41,3970.59 v1(4915,3970) ; v1(5010,4080) 5040,4050 U5.2@5094.88,4050
  Top w40: LED4.2@4124.8,6425 4124.8,6335 v1(4125,6335) ; FB1.2@4470.87,3650 v1(4525,3650) ; v1(4715,3650) R69.1@4752.36,3650 ; v1(4730,4275) C26.2@4787.01,4275 ; v1(4730,4425) C25.2@4787.01,4425 ; v1(4730,4875) C27.2@4787.01,4875 ; v1(4735,5000) C20.2@4787.01,5000 ; v1(4865,4615) 11.1@4924.41,4615 ; U6.9@5150,3750 5154.53,3745.47 5154.53,3737.2 5154.53,3630 ; C71.2@5154.53,3550 5154.53,3630 ; v1(5155,3675) 5154.53,3674.53 5154.53,3630 ; 7.1@5481.57,4025 v1(5545,4025) ; 12.1@5481.57,4635 v1(5525,4635) ; 5528.74,4150 v1(5605,4150) ; 5528.74,4750 5528.74,4814.7 5528.82,4814.7 v1(5530,4810) ; v1(6150,5050) CY2.2@6150,5330.91 ; LED1.2@6375.2,4300 v1(6435,4300) ; LED2.2@6375.2,4450 v1(6435,4450) ; LED3.2@7000.2,3875 TP_PGND1.1@7200,3875
  Bottom w12: SCI_B1.10@1050,5025 SCI_B1.9@1150,5025
  Bottom w20: v1(2375,2025) LS_B1.8@2428.94,2025 ; C34.1@2478.54,5175 v1(2525,5175) ; C28.1@2828.54,5175 v1(2875,5175) ; v1(3010,4780) 3016.14,4786.14 DBUFF_1.10@3016.14,4834.84 ; DBUFF_2.10@3066.14,2134.84 3066.14,2108.86 v1(3075,2100)
  Bottom w25: LS_A1.8@2428.94,4700 v1(2500,4700)
  Bottom w40: C32.1@2253.54,2475 v1(2305,2475) ; C33.1@2253.54,2550 v1(2305,2550) ; C38.1@2278.54,5175 v1(2325,5175) ; C39.1@2278.54,5250 v1(2325,5250) ; C36.1@2478.54,2475 v1(2530,2475) ; C37.1@2478.54,2550 v1(2530,2550) ; C35.1@2478.54,5250 v1(2525,5250) ; C29.1@2828.54,5250 v1(2875,5250) ; C30.1@2878.54,2475 v1(2925,2475) ; C31.1@2878.54,2550 v1(2925,2550) ; RPULL_DOWN1.1@3629.53,1650 v1(3675,1650) ; RPULL_DOWN2.1@3629.53,4150 v1(3705,4150) ; PS1.5@4075,5725 COUT_2.2@4075,5862.01 COUT_1.2@4225,5862.01 ; v1(4730,4425) 4.1@4818.43,4425 ; v1(4735,5000) 9.1@4818.43,5000 ; C52.2@6600,4637.99 v1(6600,4710) ; v1(6600,4850) C53.2@6600,4912.01 ; C55.2@6750,4637.99 v1(6750,4705) ; v1(6750,4850) C54.2@6750,4912.01 ; v1(8350,3550) 8350,3595.47 ; v1(8350,3780) v2(8350,3820.47)
  other v3: 7775,1117.6 7752.36,1155 7797.64,1155 7775,1192.4
PWM/BASED/DAC2: DBUFF_1.1 DBUFF_1.19 LUANCH_PAD1.31 RPULL_DOWN2.2 | length 2307.4
  Top w12: v1(2625,4400) v1(2625,5050)
  Bottom w12: v1(2625,4400) 3200,4400 3225,4375 3225,4175 3250,4150 LUANCH_PAD1.31@3300,4150 3300,4104.53 3325,4079.53 3500,4079.53 RPULL_DOWN2.2@3570.47,4150 ; v1(2625,5050) 2709.57,5050 2720,5039.57 2740.87,5039.57 DBUFF_1.19@2783.86,5039.57 2880,5039.57 2905,5065.16 DBUFF_1.1@3016.14,5065.16
PWM/BASED/DAC4: DBUFF_2.1 DBUFF_2.19 LUANCH_PAD1.71 RPULL_DOWN1.2 | length 1613.5
  Top w12: v1(3000,1650) v1(3000,2365.16)
  Bottom w12: DBUFF_2.19@2833.86,2339.57 2949.41,2339.57 2975,2365.16 v1(3000,2365.16) DBUFF_2.1@3066.14,2365.16 ; v1(3000,1650) LUANCH_PAD1.71@3300,1650 3304.53,1645.47 3304.53,1600 3325,1579.53 3500,1579.53 RPULL_DOWN1.2@3570.47,1650
R37+: L4.3 R21.1 R26.2 | length 170.5
  Top w12: R21.1@5250,1599.41 5250.59,1598.82 R26.2@5250.59,1525 5250.59,1500 5275,1475.59 5275,1440.35 L4.3@5274.21,1439.57
R37-: L4.4 R26.1 R29.1 | length 170.5
  Top w12: L4.4@5175.79,1439.57 5175,1440.35 5175,1480.59 5199.41,1505 R26.1@5199.41,1525 5200,1525.59 R29.1@5200,1599.41
RESET#: LUANCH_PAD1.16 LUANCH_PAD1.56 U4.4 | length 3535.9
  Top w12: LUANCH_PAD1.16@3400,4650 3475,4650 3500,4625 3500,3725 3350,3575 3350,2775 3500,2625 3500,2200 3450,2150 LUANCH_PAD1.56@3400,2150 3757.5,2150 3782.5,2125 3782.5,1807.5 3795,1795 3822.13,1795 U4.4@3822.44,1794.69
SCIB_RX/GPIO19: LUANCH_PAD1.3 SCI_B1.3 SCI_B1.4 | length 601.8
  Bottom w12: SCI_B1.4@1050,4725 SCI_B1.3@1150,4725 1250,4725 1375,4850 LUANCH_PAD1.3@1600,4850
SCIB_TX/GPIO18: LUANCH_PAD1.4 SCI_B1.1 SCI_B1.2 | length 601.8
  Bottom w12: SCI_B1.2@1050,4625 SCI_B1.1@1150,4625 1300,4625 1425,4750 LUANCH_PAD1.4@1600,4750
TEMP_ANA_OUT: J2.20 | length 1556.2
  Top w12: v1(5925,550) 5925,1129.53 5950,1154.53 v2(6000,1154.53) 6000,1234.65 6000.79,1260.43
  Bottom w12: J2.20@5225,450 5225,525 5250,550 v1(5925,550)
TEMP_DIFF_OUT: BUFF_3.3 IC3.1 R63.2 | length 8370
  Top w12: v1(1725,5625) 2300,5625 2350,5575 2575,5575 2725,5725 3475,5725 3575,5625 v1(3575,3450) ; R63.2@5955,1775.59 5955,1825 5975,1845 IC3.1@5975,1918.23 5975,2000 5925,2050 5925,2275 5975,2325 v1(5975,3450)
  Bottom w12: BUFF_3.3@1628.35,5625 v1(1725,5625) ; v1(3575,3450) v1(5975,3450)
TOP_HB1_IN: J2.4 LS_B1.2 PWM_6.1 | length 3716
  Top w12: v1(2500,850) 2500,2050 2525,2075 2525,2175 2500,2200 v1(2500,2325) ; PWM_6.1@4225,750 4425,550 J2.4@4425,450
  Bottom w12: LS_B1.2@2428.94,2325 v1(2500,2325) ; v1(2500,850) 4125,850 PWM_6.1@4225,750
TOP_HB2_IN: J2.7 LS_B1.6 PWM_4.1 | length 3830.7
  Top w12: v1(2450,950) 2450,1400 2475,1425 v1(2475,2125) ; PWM_4.1@4525,750 4525,625 4575,575 4575,400 J2.7@4625,350
  Bottom w12: LS_B1.6@2428.94,2125 v1(2475,2125) ; v1(2450,950) 2475,925 4350,925 PWM_4.1@4525,750
TOP_HB3_IN: J2.10 LS_B1.12 PWM_2.1 | length 4363.5
  Top w12: v1(2100,1125) 2100,1900 2150,1950 v1(2150,2175) ; J2.10@4725,450 4725,550 4825,650 PWM_2.1@4825,750
  Bottom w12: v1(2100,1125) 2575,1125 2675,1025 4550,1025 PWM_2.1@4825,750 ; v1(2150,2175) LS_B1.12@2221.06,2175
UDC_ANA_OUT: C4.1 J2.13 L4.2 | length 1117
  Top w12: J2.13@4925,350 4925,360 4975,410 4975,625 5300,950 5300,1139.53 5285,1154.53 C4.1@5250,1154.53 5250,1190.79 5274.21,1215 L4.2@5274.21,1260.43
UDC_DIFF_OUT: BUFF_4.5 IC1.1 R31.2 | length 2887
  Top w12: v1(5050,2975) 5050,2125 5150,2025 5150,1950 IC1.1@5150,1918.23 5150,1845 5130.61,1825.61 5130.61,1779.91 R31.2@5130,1775.59
  Bottom w12: BUFF_4.5@3553.35,3075 3600,3075 3625,3050 3625,2950 3650,2925 4525,2925 4575,2975 v1(5050,2975)
V_BAT: D11.1 F1.2 F2.2 F3.2 | length 1168.4
  Top w40: D11.1@8210.63,5000 8200,5010.63 8200,5100 8250,5150 F3.2@8322.5,5150 F2.2@8322.5,5300 8325,5302.5 8325,5406.1 8425,5506.1 F1.2@8947.24,5506.1
V_BAT_IN: F1.1 F2.1 F3.1 SW2.3 | length 673.6
  Top w40: F2.1@8427.5,5300 F3.1@8427.5,5150 8623.43,5150 SW2.3@8625,5151.57 8939.57,5151.57 F1.1@8947.24,5143.9
V_PROT: C7.1 C8.1 C66.1 C67.1 C68.1 C_EMI_2.1 D11.2 L1.1 L_CM1.1 TP_VBAT1.1 | length 2293.2
  Top w40: TP_VBAT1.1@8050,5250 8039.37,5239.37 D11.2@8039.37,5000 8050,4989.37 L1.1@8050,4753.15 8246.85,4753.15 8250,4750 C68.1@8305.91,4750
  Bottom w40: L_CM1.1@7635.63,5777.36 7750,5777.36 ; C66.1@7750,5862.01 7750,5777.36 ; C67.1@7900,5862.01 7900,5777.36 ; TP_VBAT1.1@8050,5250 8050,5777.36 ; C8.1@8050,5862.01 8050,5777.36 ; C7.1@8300,5862.01 8300,5777.36 C_EMI_2.1@8175,5777.36 8050,5777.36 ; 7750,5777.36 7900,5777.36 ; 7900,5777.36 8050,5777.36
VCC+: D8.2 D9.2 D15.2 | length 3088.5
  Top w20: v1(6395,2485) 6395,2090 6475,2010 v2(6475,1925)
  Bottom w20: 5380.59,2441.42 5380.59,2485 5485.59,2485 ; D8.2@5444.41,1578.58 5444.41,1610 5974.41,1610 ; D9.2@5485.59,2441.42 5485.59,2485 ; D15.2@5974.41,1578.58 5974.41,1610 ; v1(6395,2485) 5485.59,2485 ; 6475,1775 6475,1635 6450,1610 6080,1610 5974.41,1610
  Bottom w40: 6475,1775 6475,1860 v2(6475,1925)
VCC-: C6.1 D2.1 D3.1 D4.1 D5.1 D6.1 D7.1 D8.1 D9.1 D14.1 D15.1 IC1.11 IC3.11 P9.2 | length 4880.6
  Top w20: v1(5625,1550) v1(5625,2055)
  Top w25: v1(5299.53,2055) 5299.53,2131.3 IC1.11@5300,2131.77 ; v1(6125,2055) IC3.11@6125,2131.77
  Bottom w20: D5.1@5119.41,2441.42 5119.41,2405 5224.41,2405 ; D4.1@5190.59,1578.58 5190.59,1545 5290.59,1545 ; D3.1@5224.41,2441.42 5224.41,2405 ; D2.1@5290.59,1578.58 5290.59,1545 ; D7.1@5329.41,2441.42 5329.41,2405 ; D6.1@5390.59,1578.58 5390.59,1545 ; D9.1@5434.41,2441.42 5434.41,2405 ; D8.1@5495.59,1578.58 5495.59,1545 ; v1(5625,1550) v1@5625,1545 ; D15.1@6025.59,1578.58 6025.59,1545 ; D14.1@6130.59,1578.58 6130.59,1545 6025.59,1545 ; P9.2@6475,2125 6475,2275 6475,2380 6450,2405 5434.41,2405 ; 5224.41,2405 5329.41,2405 ; 5290.59,1545 5390.59,1545 ; 5329.41,2405 5434.41,2405 ; 5390.59,1545 5495.59,1545 ; 5495.59,1545 v1@5625,1545 ; v1@5625,1545 6025.59,1545
  Bottom w40: C6.1@5299.53,2130 v1(5299.53,2055) v1(5625,2055) 5675,2055 v1(6125,2055) 6455,2055 6475,2075 P9.2@6475,2125
pads on no net: 4.2 BAT_CONNECTOR1.3 BAT_CONNECTOR2.2 BAT_CONNECTOR2.3 BAT_CONNECTOR3.2 BAT_CONNECTOR3.3 BUFF_1.14 BUFF_2.1 BUFF_2.2 BUFF_2.3 BUFF_2.5 BUFF_2.6 BUFF_2.7 BUFF_2.8 BUFF_2.9 BUFF_2.10 BUFF_2.12 BUFF_2.13 BUFF_2.14 BUFF_3.5 BUFF_3.6 BUFF_3.7 BUFF_3.8 BUFF_3.9 BUFF_3.10 BUFF_3.12 BUFF_3.13 BUFF_3.14 C5.1 C25.1 C40.1 C41.1 C43.1 C45.1 C46.1 C50.1 C51.1 C$3F$1.1 C$3F$1.2 C$3F$2.1 C$3F$2.2 CAN1.3 CAN1.3/2 CAN1.5 D2.2 D3.2 D4.2 D5$2F$2.1 D5$2F$2.2 D5.2 D6$2F$2.1 D6$2F$2.2 D6.2 D7$2F$2.1 D7$2F$2.2 D7.2 D8$2F$2.1 D8$2F$2.2 D14.2 DBUFF_1.9 DBUFF_2.3 DBUFF_2.5 DBUFF_2.7 DBUFF_2.9 DBUFF_2.13 DBUFF_2.15 DBUFF_2.17 F1.$$$1 FILTER_1.5 FILTER_1.6 FILTER_1.7 FILTER_1.8 FILTER_1.9 FILTER_1.10 FILTER_1.12 FILTER_1.13 FILTER_1.14 FILTER_2.10 FILTER_2.12 IC1.4 IC2.3 IC3.4 IC3.5 IC3.6 IC3.7 IC3.8 IC3.9 IC3.10 IC3.12 IC3.13 IC3.14 IC4.3 IC4.5 J1.MP1 J1.MP2 J2.1 J2.6 J2.12 J2.27 J2.28 J_SUPPLY1.3 J_SUPPLY1.4 J_SUPPLY1.5 J_SUPPLY1.7 J_SUPPLY1.8 L2.1 L3.1 LS_A1.2 LS_A1.4 LS_A1.6 LS_A1.10 LS_A1.11 LS_A1.12 LS_A1.15 LUANCH_PAD1.2 LUANCH_PAD1.6 LUANCH_PAD1.9 LUANCH_PAD1.10 LUANCH_PAD1.23 LUANCH_PAD1.29 LUANCH_PAD1.30 LUANCH_PAD1.32 LUANCH_PAD1.33 LUANCH_PAD1.34 LUANCH_PAD1.42 LUANCH_PAD1.46 LUANCH_PAD1.49 LUANCH_PAD1.50 LUANCH_PAD1.51 LUANCH_PAD1.63 LUANCH_PAD1.64 LUANCH_PAD1.65 LUANCH_PAD1.66 LUANCH_PAD1.67 LUANCH_PAD1.68 LUANCH_PAD1.69 LUANCH_PAD1.70 LUANCH_PAD1.72 LUANCH_PAD1.73 LUANCH_PAD1.74 LUANCH_PAD1.$$$1 LUANCH_PAD1.$$$2 LUANCH_PAD1.$$$3 LUANCH_PAD1.$$$4 M1.1 M2.1 M3.1 M4.1 M5.1 M6.1 M7.1 M8.1 P$3F$1.1 P$3F$1.2 PS1.6 R25$2F$2.1 R25$2F$2.2 R26$2F$2.1 R26$2F$2.2 R27$2F$2.1 R27$2F$2.2 R28$2F$2.1 R28$2F$2.2 R29$2F$2.1 R29$2F$2.2 R30$2F$2.1 R30$2F$2.2 R31$2F$2.1 R31$2F$2.2 R32$2F$2.1 R32$2F$2.2 R33$2F$2.1 R33$2F$2.2 R34$2F$2.1 R34$2F$2.2 R35$2F$2.1 R35$2F$2.2 R36$2F$2.1 R36$2F$2.2 R62$2F$2.1 R62$2F$2.2 R63$2F$2.1 R63$2F$2.2 R67.1 R$3F$1.1 R$3F$1.2 R$3F$4.1 R$3F$4.2 R_1.2 R_3.2 RDS2.2 SCI_B1.5 SCI_B1.6 SCI_C1.5 SCI_C1.6 SW2.1 SW5$2F$2.1 SW5$2F$2.2 SW5$2F$2.3 U1.3 U4.3 U4.6 U6.5 U6.7

## Polygon pours and split planes (outlines as drawn)
3V3 on POWER PLANE "POWER PLANE-3V3" (solid, remove dead copper, pour order 2): 3625,1500 3625,3725 3975,4075 3975,4875 4125,5025 5025,5025 5100,4950 5100,3950 5150,3900 5525,3900 5550,3925 5550,4950 5625,5025 6050,5025 6125,4950 6125,3700 5525,3100 4750,3100 4650,3000 4650,1550 4525,1425 3700,1425
-15V on POWER PLANE "POWER PLANE--15V" (solid, remove dead copper, pour order 1): 1100,5850 1100,5700 875,5475 875,5075 975,4975 975,4500 1075,4400 1075,2925 675,2525 675,1500 975,1200 6600,1200 6750,1350 6750,2150 6800,2200 6950,2200 7000,2250 7000,4175 7100,4275 7100,4975 7025,5050 6650,5050 6500,5200 6500,5300 6575,5375 7375,5375 7550,5200 7550,850 7425,725 425,725 275,875 275,2450 750,2925 750,4225 700,4275 700,5850 750,5900 1050,5900
15V on POWER PLANE "POWER PLANE-15V" (solid, remove dead copper, pour order 0): 6225,1850 6225,4975 6150,5050 5550,5050 5475,4975 5475,4000 5425,3950 5225,3950 5125,4050 5125,5000 5050,5075 3575,5075 3450,5200 2425,5200 2325,5100 2325,2400 2250,2325 750,2325 725,2350 725,2550 1250,3075 1250,5025 1175,5100 975,5100 900,5175 900,5425 1175,5700 1175,6400 1250,6475 3150,6475 3775,5850 3775,5275 3850,5200 6425,5200 6625,5000 6950,5000 7050,4900 7050,4325 6950,4225 6950,2350 6875,2275 6550,2275 6475,2200 6475,2075 6500,2050 6625,2050 6675,2000 6675,1850 6625,1800 6275,1800
PGND on GND PLANE (split plane): 4444.9,6522.89 4444.9,5450 4445.29,5448.05 4446.4,5446.4 4646.4,5246.4 4648.05,5245.29 4650,5244.9 6972.89,5244.9 7044.9,5172.89 7044.9,4250 7045.29,4248.05 7046.4,4246.4 7121.4,4171.4 7123.05,4170.29 7125,4169.9 8675,4169.9 8675.92,4170.08 8676.84,4170.24 8676.89,4170.28 8676.95,4170.29 8677.73,4170.81 8678.52,4171.31 8781.92,4269.9 8997.89,4269.9 9019.9,4247.89 9019.9,952.11 8147.89,80.1 977.11,80.1 580.1,477.11 580.1,2647.89 702.11,2769.9 4347.89,2769.9 4469.9,2647.89 4469.9,1700 4470.29,1698.05 4471.4,1696.4 4546.4,1621.4 4548.05,1620.29 4550,1619.9 5047.89,1619.9 5094.9,1572.89 5094.9,975 5095.29,973.05 5096.4,971.4 5244.9,822.89 5244.9,250 5245.29,248.05 5246.4,246.4 5271.4,221.4 5273.05,220.29 5275,219.9 5625,219.9 5626.95,220.29 5628.6,221.4 5678.6,271.4 5679.71,273.05 5680.1,275 5680.1,822.89 5752.11,894.9 6850,894.9 6851.95,895.29 6853.6,896.4 6928.6,971.4 6929.71,973.05 6930.1,975 6930.1,2975 6929.71,2976.95 6928.6,2978.6 6853.6,3053.6 6851.95,3054.71 6850,3055.1 5127.11,3055.1 5055.1,3127.11 5055.1,3275 5054.71,3276.95 5053.6,3278.6 4903.6,3428.6 4901.95,3429.71 4900,3430.1 4552.11,3430.1 4455.1,3527.11 4455.1,3950 4454.71,3951.95 4453.6,3953.6 4353.6,4053.6 4351.95,4054.71 4350,4055.1 3302.11,4055.1 3078.6,4278.6 3076.95,4279.71 3075,4280.1 1600,4280.1 1598.05,4279.71 1596.4,4278.6 1372.89,4055.1 1002.11,4055.1 930.1,4127.11 930.1,5072.89 977.11,5119.9 1975,5119.9 1976.95,5120.29 1978.6,5121.4 2127.11,5269.9 2922.89,5269.9 2996.4,5196.4 2998.05,5195.29 3000,5194.9 3650,5194.9 3651.95,5195.29 3653.6,5196.4 3703.6,5246.4 3704.71,5248.05 3705.1,5250 3705.1,6472.89 3802.11,6569.9 4397.89,6569.9
GND_AUX on GND PLANE (split plane): 6869.9,2947.89 6869.9,1027.11 6797.89,955.1 5700,955.1 5698.05,954.71 5696.4,953.6 5621.4,878.6 5620.29,876.95 5619.9,875 5619.9,302.11 5597.89,280.1 5302.11,280.1 5280.1,302.11 5280.1,875 5279.71,876.95 5278.6,878.6 5130.1,1027.11 5130.1,1247.89 5177.11,1294.9 6650,1294.9 6651.95,1295.29 6653.6,1296.4 6703.6,1346.4 6704.71,1348.05 6705.1,1350 6705.1,2600 6704.71,2601.95 6703.6,2603.6 6578.6,2728.6 6576.95,2729.71 6575,2730.1 5127.11,2730.1 5080.1,2777.11 5080.1,2972.89 5127.11,3019.9 6797.89,3019.9
AGND on GND PLANE (split plane): 3644.9,5302.11 3572.89,5230.1 3052.11,5230.1 2978.6,5303.6 2976.95,5304.71 2975,5305.1 2100,5305.1 2098.05,5304.71 2096.4,5303.6 1947.89,5155.1 950,5155.1 948.05,5154.71 946.4,5153.6 896.4,5103.6 895.29,5101.95 894.9,5100 894.9,4100 895.29,4098.05 896.4,4096.4 971.4,4021.4 973.05,4020.29 975,4019.9 1400,4019.9 1401.95,4020.29 1403.6,4021.4 1602.11,4219.9 3072.89,4219.9 3271.4,4021.4 3273.05,4020.29 3275,4019.9 4322.89,4019.9 4394.9,3947.89 4394.9,3500 4395.29,3498.05 4396.4,3496.4 4496.4,3396.4 4498.05,3395.29 4500,3394.9 4872.89,3394.9 5019.9,3247.89 5019.9,2400 5020.29,2398.05 5021.4,2396.4 5023.05,2395.29 5025,2394.9 6172.89,2394.9 6219.9,2347.89 6219.9,1727.11 6172.89,1680.1 4602.11,1680.1 4505.1,1777.11 4505.1,2700 4504.71,2701.95 4503.6,2703.6 4403.6,2803.6 4401.95,2804.71 4400,2805.1 1377.11,2805.1 1280.1,2902.11 1280.1,3625 1279.71,3626.95 1278.6,3628.6 1228.6,3678.6 1226.95,3679.71 1225,3680.1 677.11,3680.1 580.1,3777.11 580.1,6172.89 702.11,6294.9 3644.9,6294.9

## Keep-outs
Keep-Out Layer:
  the board outline again, w10

## Other copper
Top:
  pour cut-out net 3V3: 4690,5060 4840,5060 4840,4820 4690,4820 4690,5060
  region net 3V3: 5800,4925 5475,4925 5300,5100 5125,5100 5100,5075 5100,4800 5050,4750 4975,4750 4950,4725 4950,4700 4925,4675 4575,4675 4550,4700 4550,5175 4575,5200 5650,5200 5800,5050 5800,4925
  region net V_PROT: 8370,4650 8250,4650 8185,4715 7965,4715 7935,4745 7935,5275 7960,5300 8095,5300 8110,5285 8110,4920 8135,4895 8365,4895 8385,4875 8385,4665 8370,4650
  region net C_EMI_-: 5850,4925 5825,4950 5825,5075 5750,5150 5750,5850 5800,5900 6300,5900 6387.5,5987.5 6387.5,6110 6425,6150 6550,6150 6700,6150 6725,6125 6725,5950 6700,5925 6650,5925 6600,5875 6600,5525 6550,5475 6025,5475 5975,5425 5975,5150 5925,5100 5925,4950 5900,4925 5850,4925
  region net NETP16_2: 5090,3760 4960,3760 4930,3730 4735,3730 4725,3740 4725,3845 4755,3875 5220,3875 5235,3860 5235,3785 5200,3785 5200,3810 5190,3820 5110,3820 5090,3800 5090,3760
  region net 5V: 4875,4475 4875,4225 4825,4175 4525,4175 4500,4150 4500,3775 4550,3725 4675,3725 4700,3750 4700,3950 4725,3975 4825,3975 4850,4000 4850,4075 4900,4125 5000,4125 5050,4175 5050,4475 4875,4475
  region net NET10_2: 5175,4680 5175,4755 5145,4785 5145,5060 5160,5075 5280,5075 5440,4915 5440,4705 5415,4680 5175,4680
  region net NON_ISOGND: 8450,4850 8450,4400 8400,4350 7700,4350 7600,4450 7600,4750 7650,4800 7825,4800 7875,4850 7875,5850 7900,5875 8975,5875 9025,5925 9025,6050 8650,6050 8575,6125 8575,6475 8525,6525 7600,6525 7550,6475 7550,6000 7575,5975 7675,5975 7700,5950 7700,5700 7425,5425 7425,4250 7475,4200 8625,4200 8675,4250 8675,4850 8650,4875 8475,4875 8450,4850
  region net NETC71_1: 5260,3325 4965,3325 4945,3345 4945,3710 4975,3740 5105,3740 5105,3655 5115,3645 5115,3460 5135,3440 5260,3440 5270,3430 5270,3335 5260,3325
  region net V_BAT: 8180,4935 8165,4950 8165,5525 8230,5600 9005,5600 9030,5575 9030,5420 9020,5410 8380,5410 8345,5375 8345,4955 8325,4935 8180,4935
  region net C_EMI_+: 6275,5950 5250,5950 5175,6025 5175,6525 5225,6575 6250,6575 6300,6525 6300,5975 6275,5950
  region net 24V: 4000,6225 4425,6225 4475,6275 4475,6500 4550,6575 5075,6575 5100,6550 5100,6075 5050,6025 4000,6025 3975,6050 3975,6200 4000,6225
  region net V_BAT_IN: 9035,5025 9020,5010 8430,5010 8405,5035 8405,5320 8430,5345 8520,5345 8535,5330 8535,5210 8560,5185 8750,5185 8795,5230 9015,5230 9035,5210 9035,5025
  region net NET5_2: 5160,4080 5415,4080 5430,4095 5430,4470 5405,4495 5170,4495 5150,4475 5150,4090 5160,4080
  region net NETC9_1: 8370,4400 7750,4400 7650,4500 7650,4725 7675,4750 7825,4750 7885,4690 8145,4690 8165,4670 8165,4625 8185,4605 8360,4605 8380,4585 8380,4410 8370,4400
  text "3996" at 70,850 h37.5 r90
  text "COMP" at 70,650 h37.5 r90
  text "LAYER1 COMP. SIDE." at 345,-100 h40
Bottom:
  region net V_PROT: 7600,5900 8350,5900 8375,5875 8375,5200 8325,5150 8000,5150 7950,5200 7950,5325 7900,5375 7625,5375 7575,5425 7575,5875 7600,5900
  region net C_EMI_-: 7275,5975 6650,5975 6600,6025 6600,6125 6650,6175 7275,6175 7300,6150 7300,6000 7275,5975
  region net -15V: 7300,4775 7125,4775 7075,4825 7075,4975 7050,5000 6575,5000 6550,5025 6550,5275 6600,5325 7300,5325 7325,5300 7325,4800 7300,4775
  region net NON_ISOGND: 7600,5950 8350,5950 8375,5975 8375,6450 8325,6500 7600,6500 7575,6475 7575,5975 7600,5950
  region net 15V: 6550,4550 7050,4550 7075,4575 7075,4700 7100,4725 7300,4725 7325,4700 7325,4300 7275,4250 6575,4250 6550,4275 6550,4550
  region net NETC9_1: 7820,4725 7795,4750 7425,4750 7400,4725 7400,4500 7425,4475 7795,4475 7820,4500 7820,4725
  region net NON_ISOGND: 7400,4780 7800,4780 7825,4805 7825,4975 7800,5000 7425,5000 7400,4975 7400,4780
  region net C_EMI_+: 7250,5675 6425,5675 6175,5925 5825,5925 5775,5975 5775,6075 5800,6100 6350,6100 6575,5875 7250,5875 7275,5850 7275,5700 7250,5675
  pour cut-out net NETBAT_CONNECTOR1_2: 8575,5400 8675,5400 8675,5295 8575,5295 8575,5400
  region net NETBAT_CONNECTOR1_2: 8775,5245 8750,5220 8550,5220 8500,5270 8500,6275 8575,6350 9000,6350 9025,6325 9025,6175 8950,6175 8875,6250 8725,6250 8675,6200 8675,5975 8775,5875 8775,5245
  text "SOLDER" at 50,1050 h30 r270
GND PLANE (plane layer: these items are gaps in the copper):
  region: 9055.12,0 0,0 0,6692.91 9055.12,6692.91 hole: 3650,6300 700,6300 575,6175 575,3775 675,3675 1225,3675 1275,3625 1275,2900 1375,2800 4400,2800 4500,2700 4500,1775 4600,1675 6175,1675 6225,1725 6225,2350 6175,2400 5025,2400 5025,3250 4875,3400 4500,3400 4400,3500 4400,3950 4325,4025 3275,4025 3075,4225 1600,4225 1400,4025 975,4025 900,4100 900,5100 950,5150 1950,5150 2100,5300 2975,5300 3050,5225 3575,5225 3650,5300 hole: 4400,6575 3800,6575 3700,6475 3700,5250 3650,5200 3000,5200 2925,5275 2125,5275 1975,5125 975,5125 925,5075 925,4125 1000,4050 1375,4050 1600,4275 3075,4275 3300,4050 4350,4050 4450,3950 4450,3525 4550,3425 4900,3425 5050,3275 5050,3125 5125,3050 6850,3050 6925,2975 6925,975 6850,900 5750,900 5675,825 5675,275 5625,225 5275,225 5250,250 5250,825 5100,975 5100,1575 5050,1625 4550,1625 4475,1700 4475,2650 4350,2775 700,2775 575,2650 575,475 975,75 8150,75 9025,950 9025,4250 9000,4275 8779.88,4275 8675,4175 7125,4175 7050,4250 7050,5175 6975,5250 4650,5250 4450,5450 4450,6525 hole: 6800,3025 5125,3025 5075,2975 5075,2775 5125,2725 6575,2725 6700,2600 6700,1350 6650,1300 5175,1300 5125,1250 5125,1025 5275,875 5275,300 5300,275 5600,275 5625,300 5625,875 5700,950 6800,950 6875,1025 6875,2950
  lines w10: 575,475 975,75 8150,75 9025,950 9025,4250 9000,4275 8779.88,4275 8675,4175 7125,4175 7050,4250 7050,5175 6975,5250 4650,5250 4450,5450 4450,6525 4400,6575 3800,6575 3700,6475 3700,5250 3650,5200 3000,5200 2925,5275 2125,5275 1975,5125 975,5125 925,5075 925,4125 1000,4050 1375,4050 1600,4275 3075,4275 3300,4050 4350,4050 4450,3950 4450,3525 4550,3425 4900,3425 5050,3275 5050,3125 5125,3050 6850,3050 6925,2975 6925,975 6850,900 5750,900 5675,825 5675,275 5625,225 5275,225 5250,250 5250,825 5100,975 5100,1575 5050,1625 4550,1625 4475,1700 4475,2650 4350,2775 700,2775 575,2650 575,475 ; 575,3775 675,3675 1225,3675 1275,3625 1275,2900 1375,2800 4400,2800 4500,2700 4500,1775 4600,1675 6175,1675 6225,1725 6225,2350 6175,2400 5025,2400 5025,3250 4875,3400 4500,3400 4400,3500 4400,3950 4325,4025 3275,4025 3075,4225 1600,4225 1400,4025 975,4025 900,4100 900,5100 950,5150 1950,5150 2100,5300 2975,5300 3050,5225 3575,5225 3650,5300 3650,6300 700,6300 575,6175 575,3775 ; 5075,2775 5075,2975 5125,3025 6800,3025 6875,2950 6875,1025 6800,950 5700,950 5625,875 5625,300 5600,275 5300,275 5275,300 5275,875 5125,1025 5125,1250 5175,1300 6650,1300 6700,1350 6700,2600 6575,2725 5125,2725 5075,2775
  text "LAYER2 SOLDER SIDE." at 375,-100 h40
Multi-Layer:
  text "3996" at -30,-100 h40
  text "DESIGNED BY SAKTHI CADD. CHENNAI. PH:24401613" at 1375,-100 h40

## Silkscreen, mask and mechanical layers (free items; w line width, h text height)
Silkscreen Top:
  text "SILKSCREEN COMP. SIDE." at 345,-100 h40
Silkscreen Bottom:
  lines w10: 2850,3940 2915,3875
  text "SILK SCREEN SOLDER SIDE." at 370,-100 h40
Paste Mask Top:
  lines w0.1: 7746.06,1111.3 7746.06,1149.09 7748.03,1151.06 7801.97,1151.06 7803.94,1149.09 7803.94,1111.3 7801.97,1109.33 7748.03,1109.33 7746.06,1111.3 ; 7746.06,1160.91 7748.03,1158.94 7801.97,1158.94 7803.94,1160.91 7803.94,1198.7 7801.97,1200.67 7748.03,1200.67 7746.06,1198.7 7746.06,1160.91
Solder Mask Top:
  text "SOLDERMASK COMP SIDE." at 345,-100 h40
Solder Mask Bottom:
  text "SOLDERMASK SOLDER SIDE." at 345,-100 h40
Drill Drawing:
  text "DRILL TEMPLATE" at 345,-100 h40